# Altium PCB Emitter.PcbDoc
Units mm, origin at the board's own origin, x right, y up, seen from the top; angles counter-clockwise.
Board outline 30.8 x 16.8 mm, 2 copper layers (Top Layer, Bottom Layer); 26 components, 12 nets, 78 pads, 16 vias.
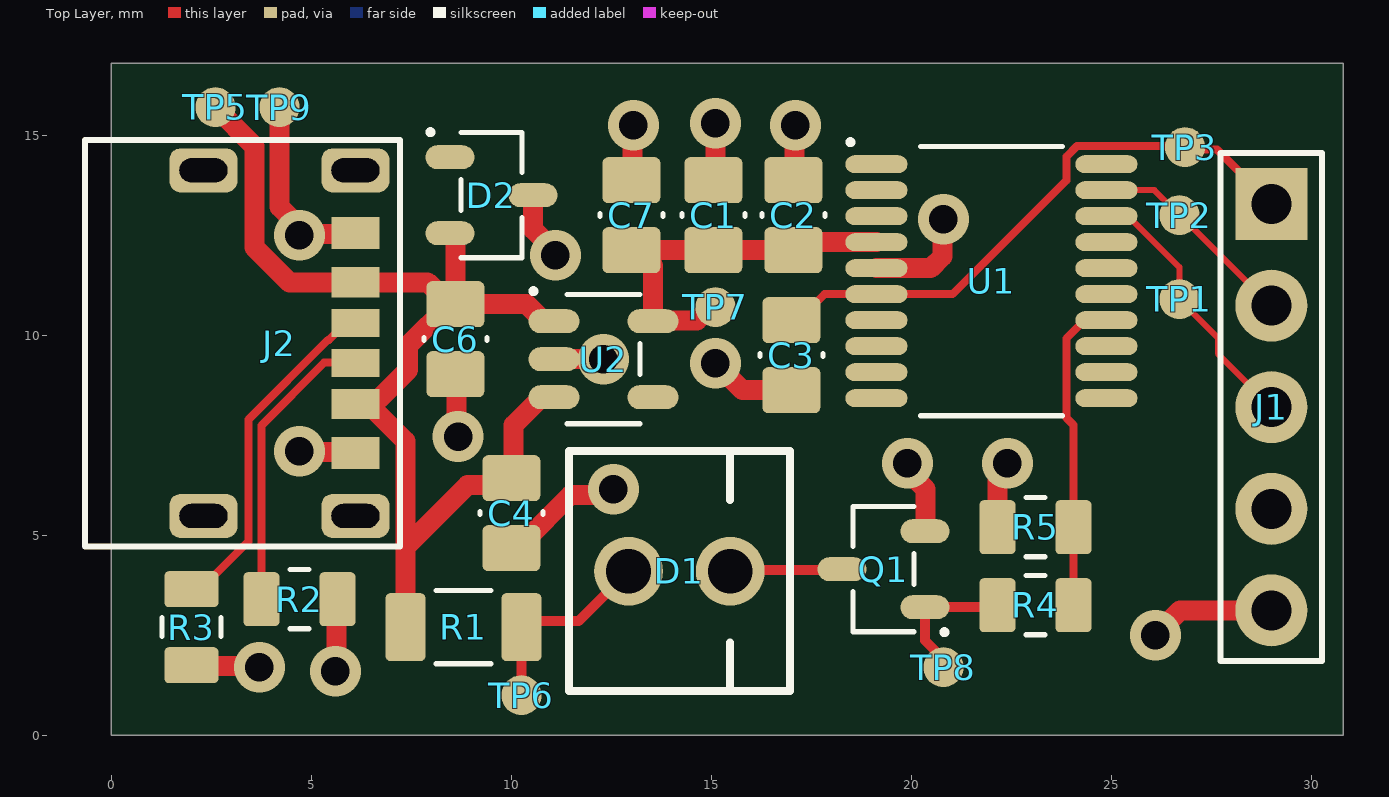
[diagram p0: Top Layer view]
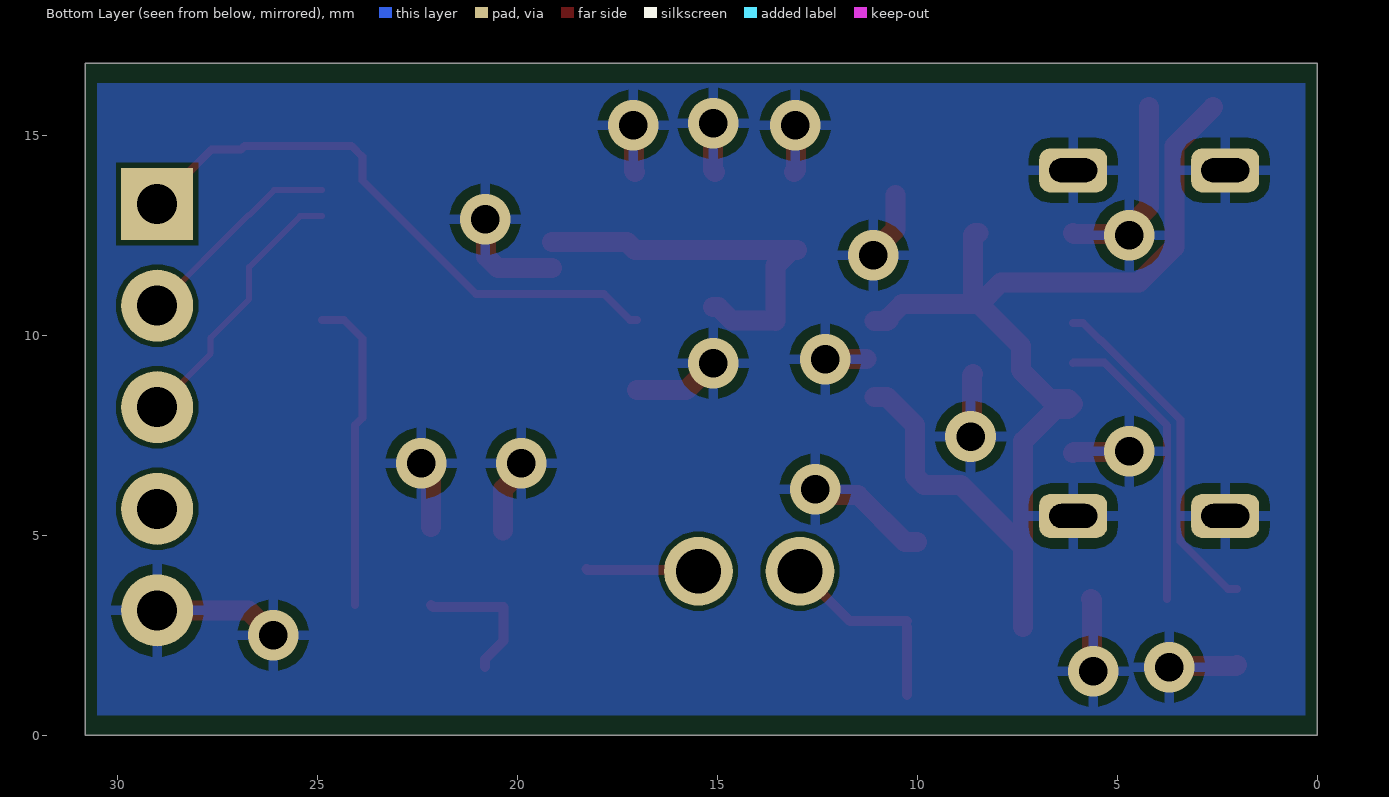
[diagram p1: Bottom Layer view, seen from below]

## Layer stack, top to bottom
Top Solder: solder mask 0.0102, Solder Resist, Dk 3.5
Top Layer: signal copper 0.0356
Dielectric 1: dielectric 0.32, FR-4, Dk 4.8
Bottom Layer: signal copper 0.0356
Bottom Solder: solder mask 0.0102, Solder Resist, Dk 3.5

## Board outline
0,0 30.8,0 30.8,16.8 0,16.8

## Design rules (kind name [scope] priority, off if disabled: settings)
Clearance [All] p1: gap=0.127 ignorepadtopadclearanceinfootprint=FALSE
Height [All] p1: minheight=0 maxheight=28 prefheight=12.7
MinimumSolderMaskSliver [All] p1: minsoldermaskwidth=0.15
PolygonConnect [All] p1: connectstyle=Relief reliefconductorwidth=0.254 reliefentries=4 polygonreliefangle="90 Angle" airgapwidth=0.254
RoutingVias RoutingVias_Power [InNetClass('Power Nets')] p1: holewidth=0.711 width=1.27 viastyle="Through Hole" minholewidth=0.711 minwidth=1.27 maxholewidth=0.711 maxwidth=1.27
RoutingVias [All] p2: holewidth=0.5 width=0.65 viastyle="Through Hole" minholewidth=0.5 minwidth=0.65 maxholewidth=0.5 maxwidth=0.65
SilkToSolderMaskClearance [IsPad] p1: minsilkscreentomaskgap=0.2 clearancetoexposedcopper=TRUE
SolderMaskExpansion [All] p1: expansion=0 istentingtop=FALSE
SupplyNets "Schematic Supply Nets_2" [InNet('+5V_VBUS')] p1: voltage=0.000
SupplyNets "Schematic Supply Nets_1" [InNet('GND')] p2: voltage=0.000
SupplyNets "Schematic Supply Nets" [InNet('+3V3_REG')] p3: voltage=0.000
Width Width_Power [InNetClass('Power Nets')] p1: maxlimit=2.5 minlimit=0.3 preferedwidth=0.5
Width [All] p2: maxlimit=0.25 minlimit=0.1 preferedwidth=0.2
27 further rules are at their usual default settings.

## Classes and differential pairs
net class "Power Nets": +3V3_REG +5V_VBUS GND

## Components (designator, comment, footprint, x,y, rotation, side; value= is the part's Value field where it differs from the comment)
C1 "4u7/50V" CAPC2012X95N 15.05,13 r270 top
C2 "0.1uF/25V" CAPC2012X95N 17.05,13 r270 top
C3 "0.1uF/25V" CAPC2012X95N 17,9.5 r90 top
C4 "10uF/25V" CAPC2012X95N 10,5.55 r90 top
C6 "1uF/50V" CAPC2012X95N 8.6,9.9 r90 top
C7 "1uF/50V" CAPC2012X95N 13,13 r270 top
D1 "TSAL6200" TSAL6200 14.2,4.1 r0 top
D2 "TPE0572BS3" SOT95P240X115-3N 9.5,13.5 r0 top
J1 "BOOMELE 2.54-1*40P (5 Pins)" HDRV_1X05_P254 29,8.2 r0 top
J2 "10164359-00011LF" 10164359-00011LF 2.9,9.8 r270 top
Q1 "AO3400" SOT95P240X115-3N 19.3,4.15 r180 top
R1 "20R" RESC3116X65N 8.8,2.7 r180 top
R2 "5k1" RESC2012X60N 4.7,3.4 r180 top
R3 "5k1" RESC2012X60N 2,2.7 r90 top
R4 "200R" RESC2012X60N 23.1,3.25 r180 top
R5 "10K" RESC2012X60N 23.1,5.2 r0 top
TP1 "Testpoint" TP_SMD_R1M0 26.7,10.9 r0 top
TP2 "Testpoint" TP_SMD_R1M0 26.7,13 r0 top
TP3 "Testpoint" TP_SMD_R1M0 26.839,14.702 r0 top
TP5 "Testpoint" TP_SMD_R1M0 2.6,15.7 r0 top
TP6 "Testpoint" TP_SMD_R1M0 10.25,1 r0 top
TP7 "Testpoint" TP_SMD_R1M0 15.1,10.7 r0 top
TP8 "Testpoint" TP_SMD_R1M0 20.8,1.7 r0 top
TP9 "Testpoint" TP_SMD_R1M0 4.2,15.7 r0 top
U1 "STM32G030F6P6TR" TSOP65P640X120-20N 22,11.35 r0 top
U2 "AP2112K-3.3TRG1" SOT95P285X140-5N 12.3,9.4 r0 top

## Footprints (in the part's own frame and the unit in brackets; to place one, negate y for a bottom-side part, rotate by r counter-clockwise, add the part's x,y. Pads: shape width x height; smd on the part's side, far side on the other; paste and mask are expansions set on the pad)
10164359-00011LF [mm]
  rect 0.7x1.2 smd: A5(-0.5,3.2) B5(0.5,3.2)
  rect 0.76x1.2 smd: A9(1.52,3.2) B9(-1.52,3.2)
  rect 0.8x1.2 smd: A12(2.75,3.2) B12(-2.75,3.2)
  rrect50% 1.1x1.7 hole 0.6 slot 1.2 at 90 deg: S1(-4.32,-0.6) S2(4.32,-0.6) S3(4.32,3.2) S4(-4.32,3.2)
  silkscreen extent -5.08,-3.56 5.08,4.32, body extent -4.47,-3.2 4.47,3.7, height 3.27
CAPC2012X95N [mm] "Chip Capacitor, 2-Leads, Body 2.00x1.25mm, IPC Medium Density"
  rrect25% 1.15x1.45 smd: 1(-0.875,0) 2(0.875,0)
  silkscreen extent -0.04,-0.79 0.04,0.79, body extent -1,-0.63 1,0.63, height 0.95
HDRV_1X05_P254 [mm]
  rect 1.8x1.8 hole 1: 1(0,5.08)
  round 1.8 hole 1: 2(0,2.54) 3(0,0) 4(0,-2.54) 5(0,-5.08)
  silkscreen extent -1.27,-6.35 1.27,6.35, body extent -1.27,-6.35 1.27,6.35, height 8.55
RESC2012X60N [mm] "Chip Resistor, 2-Leads, Body 2.00x1.25mm, IPC Medium Density"
  rrect25% 0.9x1.35 smd: 1(-0.95,0) 2(0.95,0)
  silkscreen extent -0.24,-0.74 0.24,0.74, body extent -1,-0.63 1,0.63, height 0.6
RESC3116X65N [mm] "Chip Resistor, 2-Leads, Body 3.10x1.60mm, IPC Medium Density"
  rrect25% 1x1.7 smd: 1(-1.45,0) 2(1.45,0)
  silkscreen extent -0.69,-0.91 0.69,0.91, body extent -1.55,-0.8 1.55,0.8, height 0.65
SOT95P240X115-3N [mm] "SOT23, 3-Leads, Body 2.90x2.40mm, Pitch 0.95mm, IPC Medium Density"
  oval 1.225x0.6 smd: 1(-1.038,0.95) 2(-1.038,-0.95) 3(1.037,0)
  silkscreen extent -1.59,-1.56 0.76,1.64, body extent -0.65,-1.45 0.65,1.45, height 1.15
SOT95P285X140-5N [mm] "SOT23, 5-Leads, Body 3.00x2.85mm, Pitch 0.95mm, IPC Medium Density"
  oval 1.275x0.6 smd: 1(-1.238,0.95) 2(-1.238,0) 3(-1.238,-0.95) 4(1.237,-0.95) 5(1.237,0.95)
  silkscreen extent -1.81,-1.61 0.91,1.76, body extent -0.8,-1.5 0.8,1.5, height 1.4
TP_SMD_R1M0 [mm]
  round 1 smd mask+0.1: 1(0,0)
TSAL6200 [mm]
  round 1.72 hole 1.12: 1(1.27,0) 2(-1.27,0)
  silkscreen extent -2.76,-3 2.76,3, body extent -2.82,-2.9 2.57,2.9, height 27.91
TSOP65P640X120-20N [mm] "TSOP, 20-Leads, Body 6.50x4.40mm, Pitch 0.65mm, IPC Medium Density"
  oval 1.55x0.45 smd: 1(-2.875,2.925) 2(-2.875,2.275) 3(-2.875,1.625) 4(-2.875,0.975) 5(-2.875,0.325) 6(-2.875,-0.325) 7(-2.875,-0.975) 8(-2.875,-1.625) 9(-2.875,-2.275) 10(-2.875,-2.925) 11(2.875,-2.925) 12(2.875,-2.275) 13(2.875,-1.625) 14(2.875,-0.975) 15(2.875,-0.325) 16(2.875,0.325) 17(2.875,0.975) 18(2.875,1.625) 19(2.875,2.275) 20(2.875,2.925)
  silkscreen extent -3.59,-3.36 1.77,3.54, body extent -2.2,-3.25 2.2,3.25, height 1.2

## Part data
C1: library part CL21A475KBQNNNE, "CAP CER 4.7uF 50V X5R 0805", Manufacturer="Samsung Electro-Mechanics", ComponentLink1Description=Datasheet, ComponentLink1URL=https://mm.digikey.com/Volume0/opasdata/d220001/medias/docus/5727/CL21A475KBQNNNE.pdf, Manufacturer Part Number=CL21A475KBQNNNE
C2 C3: library part CC0805KRX7R8BB104, "CAP CER 0.1UF 25V X7R 0805", Manufacturer=Yageo, ComponentLink1Description=Datasheet, ComponentLink1URL=https://yageogroup.com/content/datasheet/asset/file/UPY-GPHC_X7R_6_3V-TO-250V, Manufacturer Part Number=CC0805KRX7R8BB104
C4: library part CL21B106KAYQNNE, "CAP CER 10uF 25V X7R 0805", LCSC Part Number=C3039694, Manufacturer="Samsung Electro-Mechanics", ComponentLink1Description=Datasheet, ComponentLink1URL=https://mm.digikey.com/Volume0/opasdata/d220001/medias/docus/7851/1276_CL21B1.pdf, Manufacturer Part Number=CL21B106KAYQNNE
C6 C7: library part CC0805KKX7R9BB105, "CAP CER 1UF 50V X7R 0805", LCSC Part Number=C91185, Manufacturer=Yageo, ComponentLink1Description=Datasheet, ComponentLink1URL=https://yageogroup.com/content/datasheet/asset/file/UPY-GPHC_X7R_6_3V-TO-250V, Manufacturer Part Number=CC0805KKX7R9BB105
D1: "Infrared (IR) Emitter 940nm 1.35V 100mA 40mW/sr @ 100mA 34° Radial, 5mm Dia (T 1 3/4)", Manufacturer=Vishay, 3D Model Source="Ultra Librarian", ComponentLink1Description=Datasheet, ComponentLink1URL=https://www.vishay.com/docs/81011/tsal6400.pdf, Manufacturer Part Number=TSAL6200
D2: "ESD DIODE 5VWM 6VC 10VC SOT-23", LCSC Part Number=C2858713, Manufacturer="TECH PUBLIC", ComponentLink1Description=Datasheet, ComponentLink1URL=https://www.lcsc.com/datasheet/C2858713.pdf?spm=wm.sxq.inf.ggs___wm.fly.bg.11.xh&lcsc_vid=QABaAgJWE1YLVVZSTlReAQUDElVWAgYAFlMMUQAAQlMxVlNeRlNYXlRVRFhZVDsOAxUeFF5JWBYZEEoKFBINSQcJGk4NBhADEA4cHktRR1NADxALGw%3D%3D, Manufacturer Part Number=TPE0572BS3
J1: library part "BOOMELE 2.54-1*40P (5 Pins Only)", "CONN HEADER 40POS 2.54mm SINGLE ROW TH (5 Pins Only)", LCSC Part Number=C2337, Manufacturer="Boom Precision Electronics", Manufacturer Part Number=2.54-1*40P, ComponentLink1Description=Datasheet, ComponentLink1URL=https://www.lcsc.com/datasheet/C2337.pdf?spm=wm.sxq.inf.ggs&lcsc_vid=E1AKUgZVRlYMBVwCQFNcVFIETwAMX1xfTlRWVwFeRlQxVlNeRlBXVVJQT1hdXjsOAxUeFF5JWBYZEEoKFBINSQcJGk4NBhADEA4cHktRTlNADxALGw%3D%3D, ComponentLink2Description="3D Model Source", ComponentLink2URL=https://www.snapeda.com/parts/61300511121/Wurth%20Electronics/view-part/
J2: "USB-C Receptacle Connector 24 (6+18 Dummy) - Power Only 6 Pin Position Surface Mount, Right Angle; Through Hole", Manufacturer="Amphenol ICC (FCI)", ComponentLink1Description=Datasheet, ComponentLink1URL=https://cdn.amphenol-cs.com/media/wysiwyg/files/drawing/10164359.pdf, ComponentLink2Description="3D Model Source", ComponentLink2URL=https://www.snapeda.com/parts/10164359-00011LF/Amphenol/view-part/, Manufacturer Part Number=10164359-00011LF
Q1: "MOSFET N-CH 30V 5.8A SOT-23", LCSC Part Number=C181090, Manufacturer="Guangdong Hottech", ComponentLink1Description=Datasheet, ComponentLink1URL=https://www.lcsc.com/datasheet/C181090.pdf?spm=wm.sxq.inf.ggs___wm.ssy.em.0.tz&lcsc_vid=E1AKUgZVRlYMBVwCQFNcVFIETwAMX1xfTlRWVwFeRlQxVlNeRlBWUVNfR1VfVzsOAxUeFF5JWBYZEEoKFBINSQcJGk4eFQsCAgIaSgADAwAHC0slRlJZU1NeWQkaCgg%3D, Manufacturer Part Number=AO3400
R1: library part RC1206FR-0720RL, "RES 20 OHM 1% 1/4W 1206", LCSC Part Number=C114941, Manufacturer=Yageo, ComponentLink1Description=Datasheet, ComponentLink1URL=https://yageogroup.com/content/datasheet/asset/file/PYU-RC_GROUP_51_ROHS_L, Manufacturer Part Number=RC1206FR-0720RL
R2 R3: library part RC0805FR-075K1L, "RES 5.1K OHM 1% 1/8W 0805", LCSC Part Number=C84375, Manufacturer=Yageo, ComponentLink1Description=Datasheet, ComponentLink1URL=https://yageogroup.com/content/datasheet/asset/file/PYU-RC_GROUP_51_ROHS_L, Manufacturer Part Number=RC0805FR-075K1L
R4: library part RC0805FR-07200RL, "RES 200Ω ±1% 125mW 0805", Manufacturer=Yageo, ComponentLink1Description=Datasheet, ComponentLink1URL=https://yageogroup.com/content/datasheet/asset/file/PYU-RC_GROUP_51_ROHS_L, Manufacturer Part Number=RC0805FR-07200RL
R5: library part RT0805BRD0710KL, "RES SMD 10K OHM 0.1% 1/8W 0805", Manufacturer=Yageo, ComponentLink1Description=Datasheet, ComponentLink1URL=https://yageogroup.com/content/datasheet/asset/file/PYU-RT_1-TO-0-01_ROHS_L, Manufacturer Part Number=RT0805BRD0710KL
U1: "IC MCU 32BIT 32KB FLASH 20TSSOP", Manufacturer=STMicroelectronics, ComponentLink1Description=Datasheet, ComponentLink1URL=https://www.st.com/resource/en/datasheet/stm32g030f6.pdf, Manufacturer Part Number=STM32G030F6P6TR
U2: "IC REG LINEAR 3.3V 600MA SOT-25", LCSC Part Number=C51118, Manufacturer="Diodes Incorporated", ComponentLink1Description=Datasheet, ComponentLink1URL=https://www.diodes.com/assets/Datasheets/AP2112.pdf, Manufacturer Part Number=AP2112K-3.3TRG1

## Via types
v1: diameter 1.27/1.27 (per signal layer), hole 0.711, Top Layer to Bottom Layer, 15 vias
v2: diameter 1.27, hole 0.711, Top Layer to Bottom Layer, 1 vias

## Nets (pads, with @x,y where several pads share a name; then routed paths per layer and width w, separated by ;. In a path a pad name is that pad's centre, name@x,y a point inside that pad or via, vN(x,y) a via of type N, cw(c..) or ccw(c..) an arc to the next point about the centre after c; other vN are vias at no path point)
+3V3_REG: C1.2 C2.2 C7.2 TP7.1 U1.4 U2.5 | length 9.9
  Top Layer w0.5: C7.2 C1.2 C2.2 17.25,12.325 U1.4 ; C7.2@13.15,12.125 13.537,11.738 U2.5 13.557,10.369 14.634,10.369 14.965,10.7 TP7.1
+5V_VBUS: C4.2 C6.2 D2.2 J2.A9 J2.B9 R1.2 TP5.1 U2.1 U2.3 | length 30
  Top Layer w0.5: TP5.1 3.573,14.727 3.573,12.196 4.449,11.32 J2.B9 7.905,11.32 8.45,10.775 7.409,9.734 7.409,9.126 6.693,8.41 6.23,8.41 J2.A9 6.23,8.15 6.55,8.15 7.35,7.35 7.35,4.7 ; R1.2 7.35,4.7 ; D2.2 8.554,12.55 8.6,12.504 C6.2 10.382,10.775 10.706,10.451 10.706,10.396 10.752,10.35 U2.1 ; U2.3 10.752,8.45 10.052,7.75 10.052,6.477 9.824,6.249 8.899,6.249 7.35,4.7
GND: C1.1 C2.1 C3.1 C4.1 C6.1 C7.1 D2.3 J1.5 J2.A12 J2.B12 J2.S1 J2.S2 J2.S3 J2.S4 Q1.2 R2.1 R3.1 R5.1 TP9.1 U1.5 U2.2 | length 32
  Top Layer w0.5: R3.1 2.025,1.725 3.675,1.725 v1(3.7,1.7) ; TP9.1 4.2,13.208 4.7,12.708 v1(4.7,12.5) 4.725,12.525 6.075,12.525 J2.B12 ; v1(4.7,7.1) 4.725,7.075 6.075,7.075 J2.A12 ; v1(5.6,1.6) 5.625,1.625 5.625,3.375 R2.1 ; C6.1 8.633,8.992 8.633,7.498 v1(8.666,7.466) ; C4.1@10,4.825 10.3,4.825 11.478,6.003 12.403,6.003 v1(12.55,6.15) ; D2.3 10.537,12.649 11.1,12.086 v1(11.1,12) ; U2.2@11.263,9.4 v1(12.3,9.4) ; v1(13.05,15.25) 13.025,15.225 13.025,14.128 C7.1@13.078,14.075 ; C1.1@15.05,14.075 15.1,14.125 v1(15.1,15.3) ; v1(15.1,9.3) 15.775,8.625 C3.1 ; C2.1@17.05,14.075 17.075,14.1 17.075,15.225 v1(17.1,15.25) ; U1.5 20.482,11.675 20.775,11.968 20.775,12.875 v2(20.8,12.9) ; v1(19.9,6.8) 19.9,6.607 20.357,6.15 Q1.2@20.357,5.119 ; R5.1 22.15,6.55 v1(22.4,6.8) ; v1(26.1,2.5) 26.72,3.12 J1.5@28.5,3.12
NetD1_1: D1.1 Q1.3 | length 2.8
  Top Layer w0.25: D1.1 15.495,4.125 18.238,4.125 Q1.3
NetD1_2: D1.2 R1.1 TP6.1 | length 4.9
  Top Layer w0.25: TP6.1 R1.1 ; R1.1@10.25,2.85 11.68,2.85 D1.2
NetJ2_A5: J2.A5 R3.2 | length 8.6
  Top Layer w0.2: R3.2 2.225,3.65 3.423,4.848 3.423,7.894 5.414,9.885 5.435,9.885 5.85,10.3 J2.A5
NetJ2_B5: J2.B5 R2.2 | length 7.4
  Top Layer w0.2: R2.2 3.75,7.746 5.317,9.313 6.087,9.313 J2.B5
NetQ1_1: Q1.1 R4.2 TP8.1 | length 3.5
  Top Layer w0.25: TP8.1 20.8,1.903 20.338,2.365 Q1.1 22.1,3.2 R4.2
NMOS_GATE: R4.1 R5.2 U1.14 | length 7.9
  Top Layer w0.2: R4.1 R5.2 24.05,7.755 23.873,7.932 23.873,9.923 24.325,10.375 U1.14
NRST: C3.2 J1.1 TP3.1 U1.6 | length 14.7
  Top Layer w0.2: C3.2 17.174,10.375 17.824,11.025 U1.6 21.025,11.025 23.873,13.873 23.873,14.462 24.138,14.727 TP3.1@26.814,14.727 ; TP3.1 26.9,14.641 27.639,14.641 J1.1
SWCLK: J1.2 TP2.1 U1.19 | length 5.3
  Top Layer w0.15: U1.19 26.075,13.625 TP2.1 ; TP2.1@26.72,13 28.98,10.74 J1.2
SWDIO: J1.3 TP1.1 U1.18 | length 6.8
  Top Layer w0.15: U1.18 25.425,12.975 26.7,11.7 TP1.1 27.662,9.938 27.662,9.538 J1.3
pads on no net: D2.1 J1.4 U1.1 U1.2 U1.3 U1.7 U1.8 U1.9 U1.10 U1.11 U1.12 U1.13 U1.15 U1.16 U1.17 U1.20 U2.4

## Polygon pours and split planes (outlines as drawn)
GND on Bottom Layer "GND_L02_P000" (solid, pour order 0): 0.3,16.3 0.3,0.5 30.5,0.5 30.5,16.3